# Altium PCB lvSdbPcb.PcbDoc (part 1 of 2)
Units mm, origin at the board's own origin, x right, y up, seen from the top; angles counter-clockwise.
Board outline 45 x 70 mm, 2 copper layers (Top Layer, Bottom Layer); 60 components, 41 nets, 179 pads, 30 vias.
Unrouted connection lines stored in the file: 1.
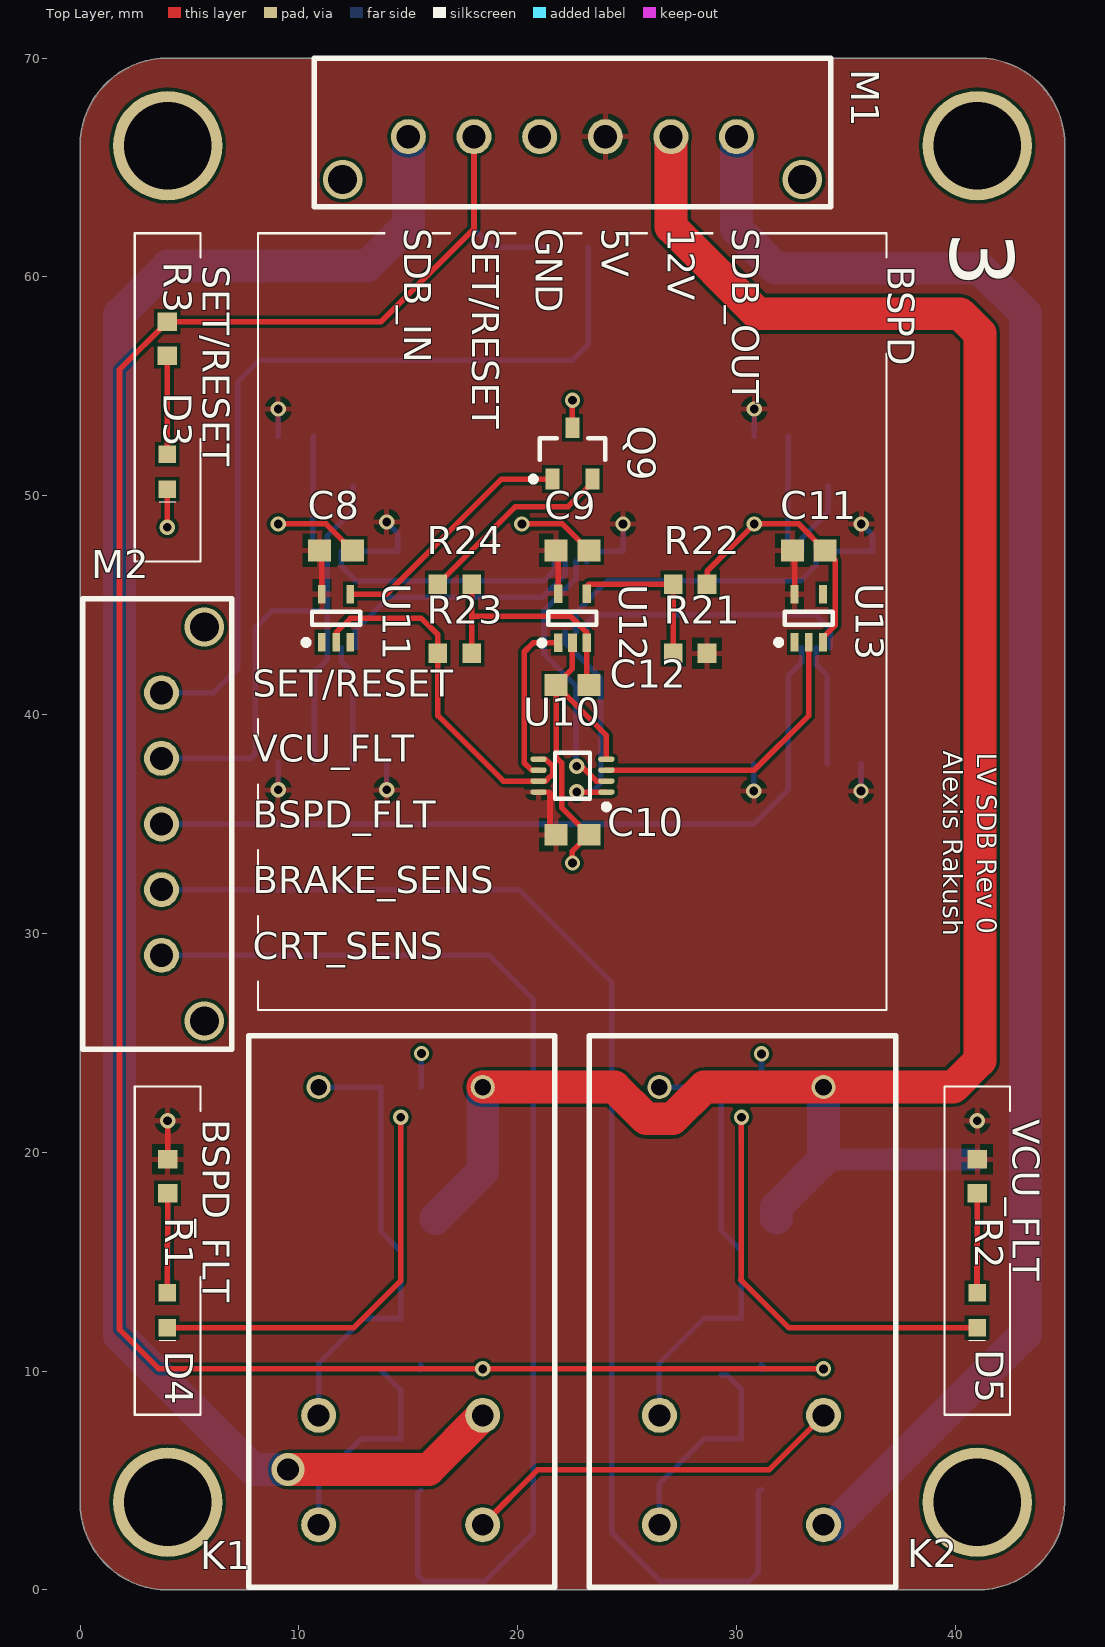
[diagram p0: Top Layer view]
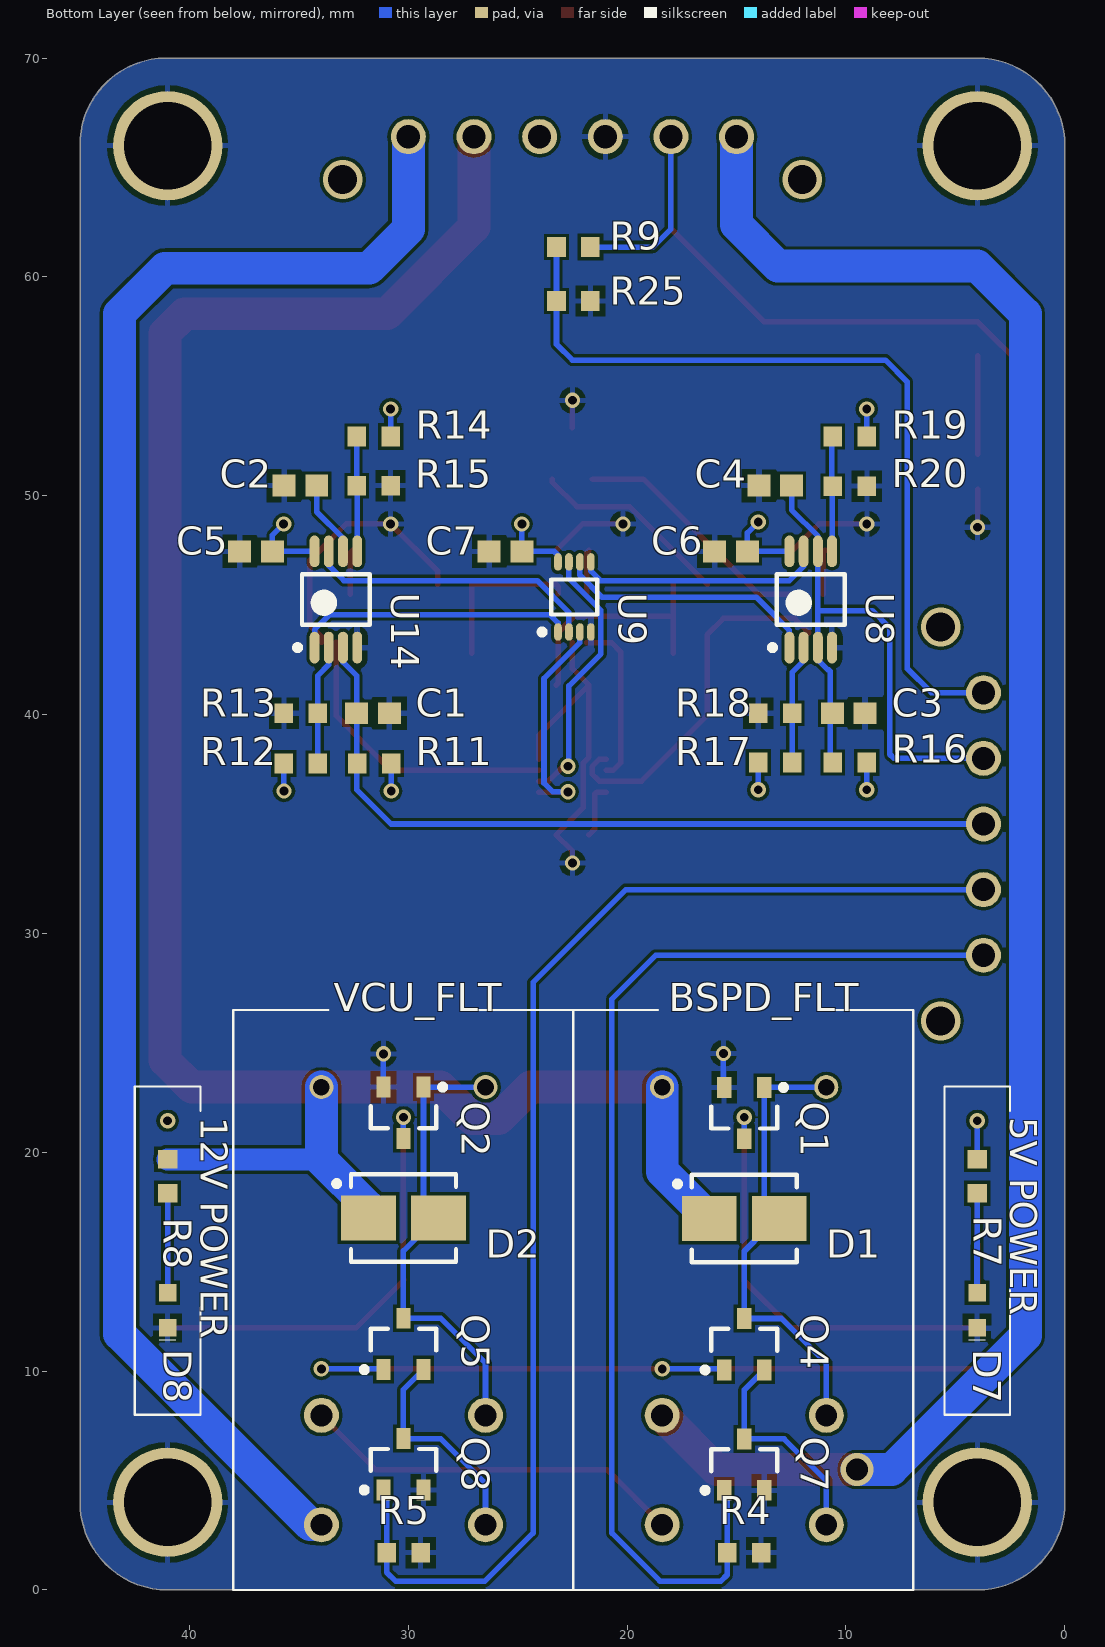
[diagram p1: Bottom Layer view, seen from below]
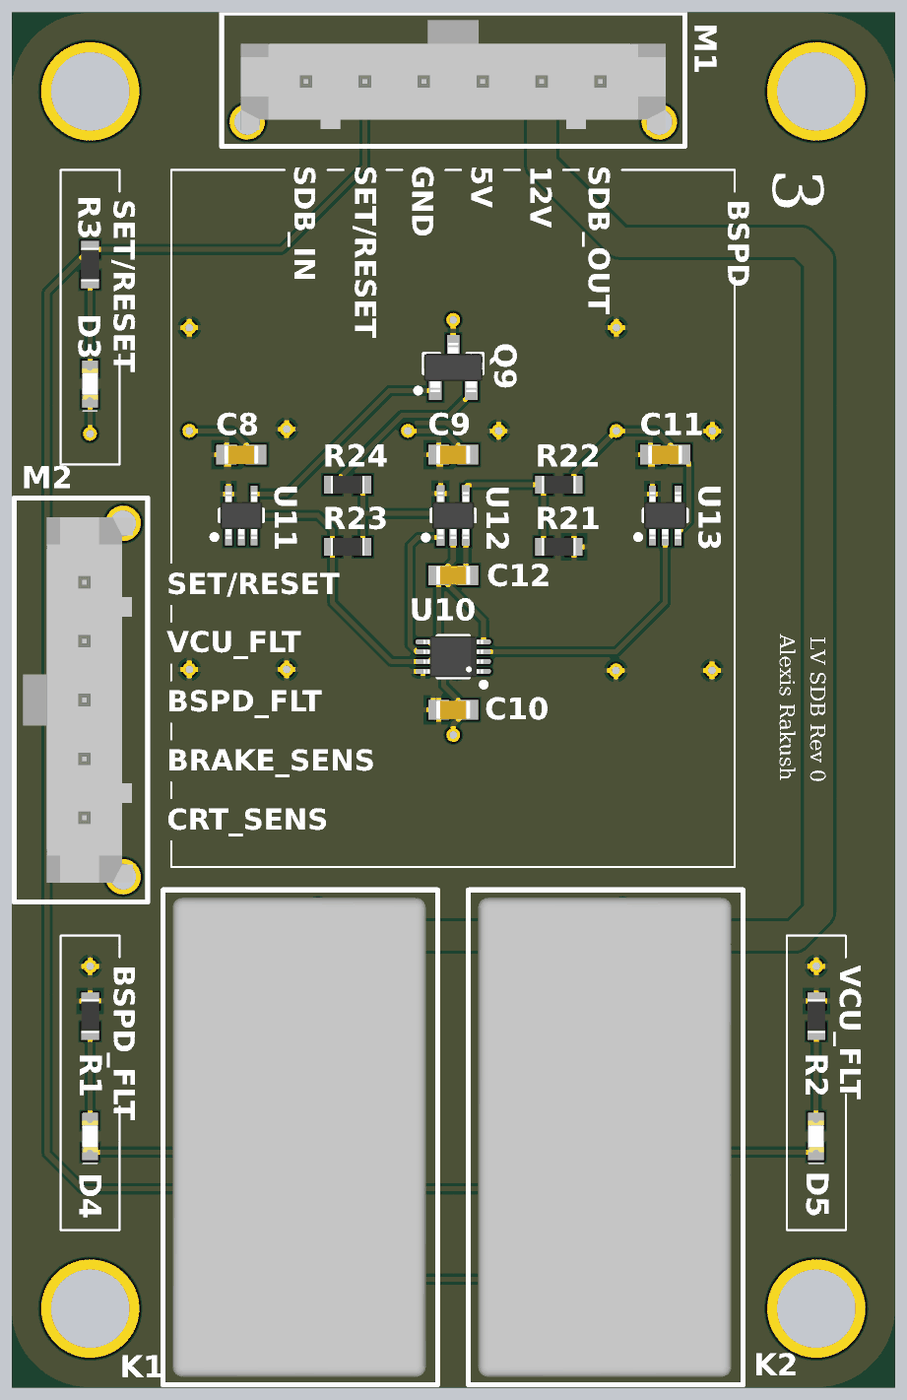
[diagram p2: 3D render of the assembled board from above, using the file's embedded part models]
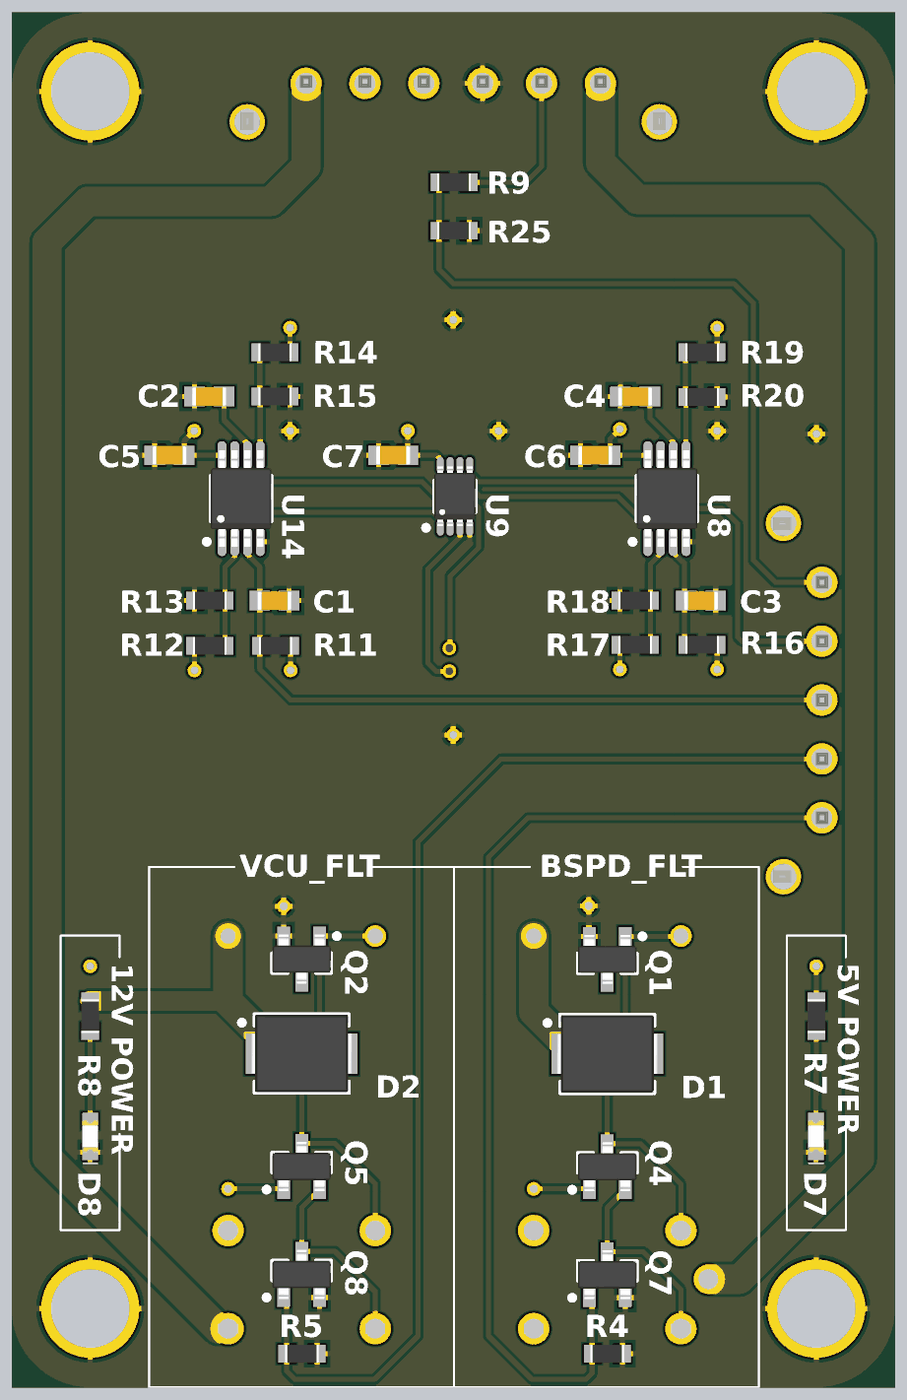
[diagram p3: 3D render of the assembled board from below, using the file's embedded part models]

## Layer stack, top to bottom
Top Solder: solder mask 0.0102, Solder Resist, Dk 3.5
Top Layer: signal copper 0.0356
Dielectric 1: dielectric 0.32, FR-4, Dk 4.8
Bottom Layer: signal copper 0.0356
Bottom Solder: solder mask 0.0102, Solder Resist, Dk 3.5

## Board outline
41,0 ccw(c41,4) 45,4 45,66 ccw(c41.05,66.05) 41.1,70 4,70 ccw(c4,66) 0,66 0,4 ccw(c4,4) 4,0

## Design rules (kind name [scope] priority, off if disabled: settings)
Clearance [All] p1: gap=0.15 ignorepadtopadclearanceinfootprint=TRUE
PolygonConnect [All] p1: connectstyle=Relief reliefconductorwidth=0.254 reliefentries=4 polygonreliefangle="90 Angle" airgapwidth=0.254
RoutingVias [All] p1: holewidth=0.711 width=1.27 viastyle="Through Hole" minholewidth=0.711 minwidth=1.27 maxholewidth=0.711 maxwidth=1.27
SolderMaskExpansion [All] p1: expansion=0.102
Width [All] p1: maxlimit=5 minlimit=0.254 preferedwidth=0.254 minimp=50.000000 maximp=50.000000 favimp=50.000000
30 further rules are at their usual default settings.

## Classes and differential pairs
component class lvSdbSchematic: D1 D2 D3 D4 D5 D7 D8 K1 K2 M1 M2 Q1 Q2 Q4 Q5 Q7 Q8 R1 R2 R3 R4 R5 R7 R8 R9 R25
component class Designator: C1 C2 C3 C4 C5 C6 C7 C8 C9 C10 C11 C12 Q9 R11 R12 R13 R14 R15 R16 R17 R18 R19 R20 R21 R22 R23 R24 U8 U9 U10 U11 U12 U13 U14

## Components (designator, comment, footprint, x,y, rotation, side; value= is the part's Value field where it differs from the comment)
C1 "100nF" CAP-0603 31.611,40.061 r0 bottom
C2 "100nF" CAP-0603 34.936,50.461 r180 bottom
C3 "100nF" CAP-0603 9.875,40.061 r0 bottom
C4 "100nF" CAP-0603 13.236,50.461 r180 bottom
C5 "100nF" CAP-0603 36.961,47.461 r180 bottom
C6 "100nF" CAP-0603 15.261,47.461 r180 bottom
C7 "100nF" CAP-0603 25.561,47.461 r0 bottom
C8 "100nF" CAP-0603 11.7,47.5 r180 top
C9 "100nF" CAP-0603 22.5,47.5 r0 top
C10 "100nF" CAP-0603 22.5,34.507 r180 top
C11 "100nF" CAP-0603 33.3,47.5 r180 top
C12 "15uF" CAP-0603 22.5,41.35 r0 top
D1 "100V" DO-214AA 14.65,16.977 r180 bottom
D2 "100V" DO-214AA 30.223,16.991 r180 bottom
D3 "Green" LED-0603 4,51.125 r90 top
D4 "Red" LED-0603 4,12.8 r90 top
D5 "Red" LED-0603 41,12.8 r90 top
D7 "Green" LED-0603 4,12.8 r90 bottom
D8 "Green" LED-0603 40.987,12.8 r90 bottom
K1 "5-1419124-6" "RELAY DPST SDC" 8.2,24.927 r270 top
K2 "5-1419124-6" "RELAY DPST SDC" 23.773,24.927 r270 top
M1 "WM10676-ND" "6-PIN MOLEX" 22.5,66.5 r0 top
M2 "WM10672-ND" "5-PIN MOLEX" 3.628,35 r90 top
Q1 "DMN6140L-13DICT-ND" SOT-23-3 14.65,21.788 r270 bottom
Q2 "DMN6140L-13DICT-ND" SOT-23-3 30.223,21.802 r270 bottom
Q4 "DMN6140L-13DICT-ND" SOT-23-3 14.65,11.227 r90 bottom
Q5 "DMN6140L-13DICT-ND" SOT-23-3 30.223,11.241 r90 bottom
Q7 "DMN6140L-13DICT-ND" SOT-23-3 14.65,5.727 r90 bottom
Q8 "DMN6140L-13DICT-ND" SOT-23-3 30.223,5.741 r90 bottom
Q9 "BSS138LT3G" SOT-23-3 22.5,51.936 r90 top
R1 "240R" RES-0603 4,18.9 r90 top
R2 "240R" RES-0603 41,18.9 r90 top
R3 "180R" RES-0603 3.987,57.175 r270 top
R4 "10K" RES-0603 14.65,1.7 r0 bottom
R5 "10K" RES-0603 30.21,1.7 r0 bottom
R7 "180R" RES-0603 4,18.9 r90 bottom
R8 "665R" RES-0603 41,18.9 r90 bottom
R9 "1K" RES-0603 22.454,61.365 r180 bottom
R11 "10K" RES-0603 31.561,37.761 r180 bottom
R12 "1K" RES-0603 34.911,37.761 r0 bottom
R13 "3K" RES-0603 34.911,40.061 r180 bottom
R14 "9.1K" RES-0603 31.586,52.711 r180 bottom
R15 "3K" RES-0603 31.586,50.461 r0 bottom
R16 "10K" RES-0603 9.825,37.811 r180 bottom
R17 "1K" RES-0603 13.236,37.811 r0 bottom
R18 "9.1K" RES-0603 13.236,40.061 r180 bottom
R19 "7.5K" RES-0603 9.825,52.711 r180 bottom
R20 "3K" RES-0603 9.825,50.436 r0 bottom
R21 "1.3K" RES-0603 27.875,42.8 r0 top
R22 "2.2K" RES-0603 27.875,45.963 r180 top
R23 "33K" RES-0603 17.125,42.8 r0 top
R24 "499" RES-0603 17.125,45.963 r0 top
R25 "2K" RES-0603 22.454,58.9 r0 bottom
U8 "TLV3202AIDGK" TLV3202AIDGK 11.611,45.261 r90 bottom
U9 "NL27WZ32USGOSCT-ND" TSSOP50P310X90-8N 22.411,45.375 r90 bottom
U10 "SN74LVC2G08DCUT" SN74LVC2G08DCU 22.5,37.211 r180 top
U11 "SN74AHC1G04DCK" SN74AHC1G04DCK 11.7,44.4 r90 top
U12 "TLV3201AIDCKR" TLV3201AIDCK 22.5,44.4 r90 top
U13 "SN74AHC1G04DCK" SN74AHC1G04DCK 33.3,44.4 r90 top
U14 "TLV3202AIDGK" TLV3202AIDGK 33.311,45.261 r90 bottom

## Footprints (in the part's own frame and the unit in brackets; to place one, negate y for a bottom-side part, rotate by r counter-clockwise, add the part's x,y. Pads: shape width x height; smd on the part's side, far side on the other; paste and mask are expansions set on the pad)
"5-PIN MOLEX" [mm]
  round 1.6 hole 1.06: 1(-6,-0.09) 2(-3,-0.09) 3(0,-0.09) 4(3,-0.09) 5(6,-0.09)
  silkscreen extent -10.29,-3.3 10.29,3.5, body extent -9.32,-2.55 9.32,3.05, height 9.95
"6-PIN MOLEX" [mm]
  round 1.6 hole 1.06: 1(-7.5,-0.09) 2(-4.5,-0.09) 3(-1.5,-0.09) 4(1.5,-0.09) 5(4.5,-0.09) 6(7.5,-0.09)
  silkscreen extent -11.8,-3.3 11.8,3.5, body extent -10.82,-2.47 10.82,3.14, height 9.95
CAP-0603 [mm] "Chip Capacitor, 2-Leads, Body 1.60x0.80mm, IPC Medium Density"
  rect 1.05x1 smd: 1(-0.75,0) 2(0.75,0)
  body extent -0.87,-0.48 0.87,0.48, height 0.9
DO-214AA [mm] "Molded Diode, 2-Leads, Body 4.40x3.62mm, IPC Medium Density"
  rect 2.5x2.05 smd: 1(-1.6,0) 2(1.6,0)
  silkscreen extent -3.17,-2 2.4,2, body extent -2.6,-1.97 2.6,1.97, height 2.41
LED-0603 [mm]
  rect 0.8x0.8 smd: 1(0.775,0.013) 2(-0.825,0.013)
  silkscreen extent -1.4,-0.36 -1.4,0.39, body extent -0.82,-0.39 0.78,0.41, height 0.7
"RELAY DPST SDC" [mm]
  round 1.1 hole 0.762: 1(1.95,2.7) 6(1.95,10.2)
  round 1.6 hole 1: 2(16.95,2.7) 3(21.95,2.7) 4(21.95,10.2) 5(16.95,10.2)
  silkscreen extent -0.4,-0.5 24.8,13.5, body extent 0,0 24.4,12.9, height 24.51
RES-0603 [mm] "Chip Resistor, 2-Leads, Body 1.60x0.80mm, IPC Medium Density"
  rect 0.85x0.9 smd: 1(-0.775,0) 2(0.775,0)
  body extent -0.85,-0.45 0.85,0.45, height 0.55
SN74AHC1G04DCK [mm] "SOT23, 5-Leads, Body 2.00x2.10mm, Pitch 0.65mm, IPC Medium Density"
  rect 0.85x0.35 smd: 1(-1.1,0.65) 2(-1.1,0) 3(-1.1,-0.65) 4(1.1,-0.65) 5(1.1,0.65)
  silkscreen extent -1.22,-1.1 0.3,1.5, body extent -1.2,-1.07 1.2,1.07, height 1.1
SN74LVC2G08DCU [mm] "TSSOP, 8-Leads, Body 2.00x2.30mm, Pitch 0.50mm, IPC Medium Density"
  oval 0.75x0.25 smd: 1(-1.55,0.75) 2(-1.55,0.25) 3(-1.55,-0.25) 4(-1.55,-0.75) 5(1.55,-0.75) 6(1.55,-0.25) 7(1.55,0.25) 8(1.55,0.75)
  silkscreen extent -1.68,-1.05 0.8,1.55, body extent -1.55,-1.05 1.55,1.05, height 0.9
SOT-23-3 [mm] "SOT23, 3-Leads, Body 2.90x2.40mm, Pitch 0.92mm, IPC Medium Density"
  rect 0.95x0.65 smd: 1(-1.175,0.915) 2(1.175,0) 3(-1.175,-0.915)
  silkscreen extent -1.3,-1.5 0.7,1.91, body extent -1.25,-1.5 1.25,1.5, height 1.1
TLV3201AIDCK [mm] "SOT23, 5-Leads, Body 2.00x2.10mm, Pitch 0.65mm, IPC Medium Density"
  rect 0.85x0.4 smd: 1(-1.125,0.65) 2(-1.125,0) 3(-1.125,-0.65) 4(1.125,-0.65) 5(1.125,0.65)
  silkscreen extent -1.25,-1.1 0.3,1.52, body extent -1.2,-1.07 1.2,1.07, height 1.1
TLV3202AIDGK [mm] "TSOP, 8-Leads, Body 3.00x3.00mm, Pitch 0.65mm, IPC Medium Density"
  oval 1.45x0.45 smd: 1(-2.2,0.975) 2(-2.2,0.325) 3(-2.2,-0.325) 4(-2.2,-0.975) 5(2.2,-0.975) 6(2.2,-0.325) 7(2.2,0.325) 8(2.2,0.975)
  silkscreen extent -2.32,-1.55 1.15,1.88, body extent -2.45,-1.55 2.45,1.55, height 1.1
TSSOP50P310X90-8N [mm] "TSSOP, 8-Leads, Body 2.00x2.30mm, Pitch 0.50mm, IPC Medium Density"
  oval 0.8x0.35 smd: 1(-1.6,0.75) 2(-1.6,0.25) 3(-1.6,-0.25) 4(-1.6,-0.75) 5(1.6,-0.75) 6(1.6,-0.25) 7(1.6,0.25) 8(1.6,0.75)
  silkscreen extent -1.72,-1.05 0.8,1.6, body extent -1.55,-1.05 1.55,1.05, height 0.9

## Part data
C1 C2 C3 C4 C5 C6 C7 C8 C9 C10 C11: library part CL10B104KB8NNNL, "CAP CER 0.1UF 50V X7R 0603", Capacitance=10uF, Case/Package=0805, Case Code (Metric)=2012, Dielectric=X5R, Manufacturer=Samsung, Manufacturer Part Number=CL21A106KPFNNNG, Max Operating Temperature=85°C, Min Operating Temperature=-55°C, Package Quantity=3000, Supplier Part Number 1=1276-6456-1-ND, Tolerance=10%, Voltage=10V, Case Code (Imperial)=0805, ComponentLink1Description=http://www1.futureelectronics.com/doc/SAMSUNG/CL21A106KPFNNNG.pdf?src-supplier=Future+Electronics, ComponentLink1URL=http://www1.futureelectronics.com/doc/SAMSUNG/CL21A106KPFNNNG.pdf?src-supplier=Future+Electronics, ComponentLink2Description=https://www.verical.com/server-webapp/html/getDatasheet?partID=640497&src-supplier=Verical, ComponentLink2URL=https://www.verical.com/server-webapp/html/getDatasheet?partID=640497&src-supplier=Verical, Depth=1.25mm, Height=1.25mm, Lead Free="Lead Free", Length=2mm, Mount="Surface Mount", Packaging="Tape and Reel", Pricing 1="1=0.15, 10=0.104, 100=0.0489, 500=0.03428, 1000=0.02837 (USD)", Radiation Hardening=No, Stock 1=0, Supplier 1=Digi-Key, Termination=Wraparound, Thickness=0.053inch, Voltage Rating=10V, Width=0.049inch
C12: library part C1608X5R0J156M080AC, "CAP CER 15UF 6.3V X5R 0603"
D1 D2: library part Diode-100V-3A, "DIODE GEN PURP 100V 3A DO214AA", Average Rectified Current=3A, Forward Voltage=1.15V, Manufacturer=MCC, Manufacturer Part Number=S3BB-TP, Max Surge Current=100A, Package Quantity=1, Peak Reverse Current=10uA, Supplier Part Number 1=S3BB-TPMSDKR-ND, ComponentLink1Description=http://www.mccsemi.com/up_pdf/S3AB-S3MB(SMB).PDF?src-supplier=Digi-Key, ComponentLink1URL=http://www.mccsemi.com/up_pdf/S3AB-S3MB(SMB).PDF?src-supplier=Digi-Key, ComponentLink2Description=https://www.verical.com/server-webapp/html/getDatasheet?partID=686538&src-supplier=Verical, ComponentLink2URL=https://www.verical.com/server-webapp/html/getDatasheet?partID=686538&src-supplier=Verical, ComponentLink3Description=http://www.mccsemi.com/up_pdf/S3AB-S3MB(SMB).PDF?src-supplier=Future+Electronics, ComponentLink3URL=http://www.mccsemi.com/up_pdf/S3AB-S3MB(SMB).PDF?src-supplier=Future+Electronics, Element Configuration=Single, Lead Free="Lead Free", Max Repetitive Reverse Voltage (Vrrm)=100V, Max Reverse Voltage (DC)=100V, Mount="Surface Mount", Number of Pins=2, Packaging="Tape and Reel", Peak Non-Repetitive Surge Current=100A, Pricing 1="1=0.46, 10=0.376, 25=0.344, 100=0.216, 250=0.2136, 500=0.2, 1000=0.136 (USD)", Radiation Hardening=No, Reverse Voltage=100V, Stock 1=9444, Supplier 1=Digi-Key
D3 D7 D8: library part LED-Green, "LED GREEN CLEAR 0603 SMD", Case/Package=0603, Case Code (Metric)=1608, Forward Current=30mA, Forward Voltage=2V, Manufacturer="Wurth Electronics", Manufacturer Part Number=150060VS75000, Max Operating Temperature=85°C, Min Operating Temperature=-40°C, Package Quantity=1, Supplier Part Number 1=732-4980-1-ND, Test Current=20mA, Case Code (Imperial)=0603, Color=Green, ComponentLink1Description=https://katalog.we-online.de/led/datasheet/150060VS75000.pdf?src-supplier=Digi-Key, ComponentLink1URL=https://katalog.we-online.de/led/datasheet/150060VS75000.pdf?src-supplier=Digi-Key, Dominant Wavelength=570nm, Height=0.7mm, Length=1.6mm, Lens Style=Clear,Rectangular, Luminous Intensity=40mcd, Mount="Surface Mount", Number of Pins=2, Packaging="Tape and Reel", Pricing 1="1=0.14, 50=0.133, 100=0.114, 500=0.099 (USD)", REACH SVHC=Unknown, Stock 1=118118, Supplier 1=Digi-Key, Viewing Angle=140°, Wavelength=570nm, Width=0.8mm
D4 D5: library part LED-Red, "LED RED CLEAR 0603 SMD", Case/Package=0603, Case Code (Metric)=1608, Forward Current=30mA, Forward Voltage=2V, Manufacturer="Wurth Electronics", Manufacturer Part Number=150060RS75000, Max Operating Temperature=85°C, Min Operating Temperature=-40°C, Package Quantity=1, Supplier Part Number 1=732-4978-6-ND, Test Current=20mA, Case Code (Imperial)=0603, Color=Red, ComponentLink1Description=https://katalog.we-online.de/led/datasheet/150060RS75000.pdf?src-supplier=Digi-Key, ComponentLink1URL=https://katalog.we-online.de/led/datasheet/150060RS75000.pdf?src-supplier=Digi-Key, ComponentLink2Description=http://www.produktinfo.conrad.com/datenblaetter/750000-774999/759428-da-01-en-CHIPLED_0603_W_KL_ROT_150060RS75000.pdf?src-supplier=Conrad, ComponentLink2URL=http://www.produktinfo.conrad.com/datenblaetter/750000-774999/759428-da-01-en-CHIPLED_0603_W_KL_ROT_150060RS75000.pdf?src-supplier=Conrad, Dominant Wavelength=625nm, Height=0.7mm, Length=1.6mm, Lens Style=Clear,Rectangular, Luminous Intensity=250mcd, Mount="Surface Mount", Packaging="Cut Tape", Pricing 1="1=0.14, 50=0.133, 100=0.114, 500=0.099 (USD)", REACH SVHC=Unknown, Stock 1=18518, Supplier 1=Digi-Key, Viewing Angle=140°, Wavelength=625nm, Width=0.8mm
K1 K2: "General Purpose Relay, Osa Series, Power, Non Latching, Dpst-No, 12 Vdc, 3 A Rohs Compliant: Yes", Coil Current=45mA, Coil Power=600mW, Coil Resistance=270R, Coil Voltage (DC)=12V, Contact Current Rating=3A, Contact Voltage Rating (AC)=240V, Manufacturer="TE Connectivity", Max Operating Temperature=60°C, Min Operating Temperature=-30°C, Package Quantity=1000, Supplier Part Number 1=OSA-SS-212DM3,000-ND, Category=Relays, Coil Type=Non-Latching, ComponentLink1Description=http://www.farnell.com/datasheets/1652820.pdf?src-supplier=Farnell, ComponentLink1URL=http://www.farnell.com/datasheets/1652820.pdf?src-supplier=Farnell, ComponentLink2Description=http://www.farnell.com/cad/1652820.pdf?src-supplier=Element14, ComponentLink2URL=http://www.farnell.com/cad/1652820.pdf?src-supplier=Element14, ComponentLink3Description=http://www.te.com/commerce/DocumentDelivery/DDEController?Action=srchrtrv&DocNm=5-1419124-6&DocType=Customer+Drawing&DocLang=English&src-supplier=Digi-Key, ComponentLink3URL=http://www.te.com/commerce/DocumentDelivery/DDEController?Action=srchrtrv&DocNm=5-1419124-6&DocType=Customer+Drawing&DocLang=English&src-supplier=Digi-Key, Contact Material=Silver, ELV=Compliant, Height=0.976inch, Length=24.4mm, Manufacturer Part Number=5-1419124-6, Mount="Through Hole", Operate Time=20ms, Packaging=Box, Pricing 1="1=2.54, 10=2.385, 25=2.1204, 50=2.0142, 100=1.9083, 250=1.69624, 500=1.59022, 1000=1.48421, 5000=1.4312 (USD)", REACH SVHC=Unknown, Relay Type="General Purpose", Release Time=10ms, Stock 1=2593, Supplier 1=Digi-Key, Termination=PCB, Throw Configuration=DPST, Weight=13g, Width=12.9mm
M1: library part "6 PIN HDR", "CONN HEADER VERT 6POS 3MM", Supplier 1=Digi-Key, Supplier Part Number 1=WM10676-ND
M2: library part "5 PIN HDR", "CONN HEADER VERT 5POS 3MM", Supplier 1=Digi-Key, Supplier Part Number 1=WM10672-ND
Q1 Q2 Q4 Q5 Q7 Q8: library part N-FET-60V-1.6A, "MOSFET N-CH 60V 1.6A SOT23", Case/Package=TO-236-3, Continuous Drain Current (ID)=1.6A, Drain to Source Voltage (Vdss)=60V, Input Capacitance=315pF, Manufacturer=Diodes, Manufacturer Part Number=DMN6140L-13, Max Operating Temperature=150°C, Max Power Dissipation=700mW, Min Operating Temperature=-55°C, Package Quantity=10000, Supplier Part Number 1=DMN6140L-13DIDKR-ND, ComponentLink1Description=https://www.diodes.com/assets/Datasheets/DMN6140L.pdf?src-supplier=Digi-Key, ComponentLink1URL=https://www.diodes.com/assets/Datasheets/DMN6140L.pdf?src-supplier=Digi-Key, Mount="Surface Mount", Packaging="Cut Tape", Pricing 1="1=0.34, 10=0.256, 25=0.224, 100=0.1217, 250=0.12104, 500=0.09926, 1000=0.07365, 2500=0.06468, 5000=0.05924 (USD)", Rds On Max=140mR, Stock 1=274948, Supplier 1=Digi-Key
Q9: "MOSFET N-CH 50V 200MA SOT-23", Case/Package=SOT-23-3, Continuous Drain Current (ID)=200mA, Drain to Source Breakdown Voltage=50V, Drain to Source Resistance=3.5R, Gate to Source Voltage (Vgs)=20V, Input Capacitance=50pF, Manufacturer="ON Semiconductor", Max Operating Temperature=150°C, Max Power Dissipation=225mW, Min Operating Temperature=-55°C, Package Quantity=1, Supplier Part Number 1=BSS138LT3GOSCT-ND, Threshold Voltage=500mV, ComponentLink1Description=DigiKey, ComponentLink1URL=https://www.digikey.ca/product-detail/en/BSS138LT3G/BSS138LT3GOSCT-ND/2120566/?itemSeq=274498102, Current Rating=200mA, Drain to Source Voltage (Vdss)=50V, Element Configuration=Single, Halogen Free="Halogen Free", Height=0.94mm, Lead Free="Lead Free", Length=2.9mm, Manufacturer Part Number=BSS138LT3G, Nominal Vgs=500mV, Number of Elements=1, Number of Pins=3, On-State Resistance=3.5R, Packaging="Tape and Reel", Power Dissipation=225mW, Pricing 1="1=0.45, 10=0.408, 100=0.2284, 500=0.12234, 1000=0.0832 (USD)", Radiation Hardening=No, Rds On Max=3.5R, REACH SVHC="No SVHC", Stock 1=195647, Supplier 1=Digi-Key, Turn-Off Delay Time=20ns, Turn-On Delay Time=20ns, Voltage Rating (DC)=50V, Width=1.3mm
R1 R2: library part 0603-240R, "RES 240 OHM 1% 1/10W 0603", Case/Package=0603, Case Code (Metric)=1608, Manufacturer="Stackpole Electronics", Manufacturer Part Number=RMCF0603FT240R, Max Operating Temperature=155°C, Max Power Dissipation=100mW, Min Operating Temperature=-55°C, Package Quantity=5000, Supplier Part Number 1=738-RMCF0603FT240RDKR-ND, Temperature Coefficient=100ppm/°C, Tolerance=1%, Case Code (Imperial)=0603, ComponentLink1Description=https://www.seielect.com/catalog/SEI-RMCF_RMCP.pdf?src-supplier=Avnet, ComponentLink1URL=https://www.seielect.com/catalog/SEI-RMCF_RMCP.pdf?src-supplier=Avnet, ComponentLink2Description=http://components.arrow.com/part/dataview/40960290S7280662N1174?src-supplier=Arrow, ComponentLink2URL=http://components.arrow.com/part/dataview/40960290S7280662N1174?src-supplier=Arrow, ComponentLink3Description=https://www.seielect.com/catalog/SEI-Packaging.pdf?src-supplier=Digi-Key, ComponentLink3URL=https://www.seielect.com/catalog/SEI-Packaging.pdf?src-supplier=Digi-Key, ComponentLink4Description=https://www.seielect.com/Catalog/SEI-RMCF_RMCP.pdf?src-supplier=Digi-Key, ComponentLink4URL=https://www.seielect.com/Catalog/SEI-RMCF_RMCP.pdf?src-supplier=Digi-Key, ComponentLink5Description=http://www.seielect.com/Catalog/SEI-RMC.pdf?src-supplier=Future+Electronics, ComponentLink5URL=http://www.seielect.com/Catalog/SEI-RMC.pdf?src-supplier=Future+Electronics, Composition="Thick Film", Contact Plating=Tin,Matte, Features="Automotive AEC-Q200", Height=0.022inch, Lead Free="Lead Free", Length=0.061inch, Mount="Surface Mount", Number of Terminations=2, Packaging="Tape and Reel", Power Rating=100mW, Pricing 1="1=0.1, 10=0.016, 100=0.0065, 1000=0.00292, 2500=0.00253 (USD)", Radiation Hardening=No, Resistance=240R, Stock 1=23096, Supplier 1=Digi-Key, Width=0.031inch
R3 R7: library part 0603-180R, "RES SMD 180 OHM 1% 1/10W 0603", Case/Package=0603, Case Code (Metric)=1608, Manufacturer="TE Connectivity", Manufacturer Part Number=CRGCQ0603F180R, Max Operating Temperature=155°C, Max Power Dissipation=100mW, Min Operating Temperature=-55°C, Supplier Part Number 1=A129679DKR-ND, Temperature Coefficient=100ppm/°C, Tolerance=1%, Case Code (Imperial)=0603, ComponentLink1Description=https://www.te.com/commerce/DocumentDelivery/DDEController?Action=srchrtrv&DocNm=1773204-3&DocType=DS&DocLang=English&src-supplier=Digi-Key, ComponentLink1URL=https://www.te.com/commerce/DocumentDelivery/DDEController?Action=srchrtrv&DocNm=1773204-3&DocType=DS&DocLang=English&src-supplier=Digi-Key, ComponentLink2Description=https://www.te.com/commerce/DocumentDelivery/DDEController?Action=srchrtrv&amp;DocNm=1773204-3&amp;DocType=DS&amp;DocLang=English&src-supplier=Digi-Key, ComponentLink2URL=https://www.te.com/commerce/DocumentDelivery/DDEController?Action=srchrtrv&amp;DocNm=1773204-3&amp;DocType=DS&amp;DocLang=English&src-supplier=Digi-Key, ComponentLink3Description=http://www.te.com/commerce/DocumentDelivery/DDEController?Action=srchrtrv&DocNm=1773204-3&DocType=DS&DocLang=English&src-supplier=Digi-Key, ComponentLink3URL=http://www.te.com/commerce/DocumentDelivery/DDEController?Action=srchrtrv&DocNm=1773204-3&DocType=DS&DocLang=English&src-supplier=Digi-Key, ComponentLink4Description=http://www.farnell.com/datasheets/2609223.pdf?src-supplier=Farnell, ComponentLink4URL=http://www.farnell.com/datasheets/2609223.pdf?src-supplier=Farnell, Composition="Thick Film", Features="Moisture Resistant,Automotive AEC-Q200", Number of Terminations=2, Packaging="Tape and Reel", Pricing 1="1=0.1, 10=0.03, 100=0.012, 1000=0.00541, 2500=0.00469 (USD)", Resistance=180R, Stock 1=17329, Supplier 1=Digi-Key
R4 R5: library part 0603-10KR, "RES SMD 10K OHM 5% 1/10W 0603", Case/Package=0603, Case Code (Metric)=1608, Manufacturer=Yageo, Manufacturer Part Number=RC0603JR-0710KL, Max Operating Temperature=155°C, Max Power Dissipation=100mW, Min Operating Temperature=-55°C, Resistance=10kR, Supplier Part Number 1=311-10KGRDKR-ND, Temperature Coefficient=100ppm/°C, Tolerance=5%, Voltage Rating=50V, Case Code (Imperial)=0603, ComponentLink1Description=http://www.yageo.com/documents/recent/PYu-RC_Group_51_RoHS_L_10.pdf?src-supplier=Digi-Key, ComponentLink1URL=http://www.yageo.com/documents/recent/PYu-RC_Group_51_RoHS_L_10.pdf?src-supplier=Digi-Key, Composition="Thick Film", Contact Plating=Tin,Matte, Depth=0.8mm, Features="Moisture Resistant", Height - Seated (Max)=0.022inch, Lead Free="Lead Free", Length=0.063inch, Military Standard=Not, Number of Pins=2, Number of Terminations=2, Packaging="Tape and Reel", Power Rating=100mW, Pricing 1="1=0.1, 10=0.019, 100=0.0077, 1000=0.00347, 2500=0.00301 (USD)", Radiation Hardening=No, REACH SVHC=Unknown, Stock 1=3006558, Supplier 1=Digi-Key, Termination=SMD/SMT, Voltage Rating (DC)=50V, Width=0.031inch
R8: library part 0603-665R, "RES SMD 665 OHM 1% 1/10W 0603", Case/Package=0603, Case Code (Metric)=1608, Manufacturer=Yageo, Manufacturer Part Number=RC0603FR-07665RL, Max Operating Temperature=155°C, Max Power Dissipation=100mW, Min Operating Temperature=-55°C, Package Quantity=1, Supplier Part Number 1=311-665HRDKR-ND, Temperature Coefficient=100ppm/°C, Tolerance=1%, Voltage Rating=75V, Voltage Rating (DC)=50V, Case Code (Imperial)=0603, ComponentLink1Description=http://www.yageo.com/documents/recent/PYu-RC_Group_51_RoHS_L_9.pdf?src-supplier=Digi-Key, ComponentLink1URL=http://www.yageo.com/documents/recent/PYu-RC_Group_51_RoHS_L_9.pdf?src-supplier=Digi-Key, ComponentLink2Description=http://www.yageo.com/documents/recent/PYu-RC0603_51_RoHS_L_4.pdf?src-supplier=Avnet, ComponentLink2URL=http://www.yageo.com/documents/recent/PYu-RC0603_51_RoHS_L_4.pdf?src-supplier=Avnet, ComponentLink3Description=http://www.yageo.com/documents/recent/PYu-RC_Group_51_RoHS_L_10.pdf?src-supplier=Digi-Key, ComponentLink3URL=http://www.yageo.com/documents/recent/PYu-RC_Group_51_RoHS_L_10.pdf?src-supplier=Digi-Key, ComponentLink4Description=http://www.yageo.com/documents/recent/PYu-RC0603_51_RoHS_L_4.pdf?src-supplier=Avnet+Europe, ComponentLink4URL=http://www.yageo.com/documents/recent/PYu-RC0603_51_RoHS_L_4.pdf?src-supplier=Avnet+Europe, Composition="Thick Film", Contact Plating=Tin,Matte, Depth=0.8mm, Features="Moisture Resistant", Height=0.022inch, Lead Free="Lead Free", Length=1.6mm, Military Standard=Not, Number of Terminations=2, Packaging="Tape and Reel", Power Rating=100mW, Pricing 1="1=0.1, 10=0.023, 100=0.0094, 1000=0.00421, 2500=0.00366 (USD)", Resistance=665R, Stock 1=143871, Supplier 1=Digi-Key, Termination=SMD/SMT, Weight=7.1E-05oz, Width=0.8mm
R9: library part 0603-1KR, "RES SMD 1K OHM 1% 1/10W 0603", Case/Package=0603, Case Code (Metric)=1608, Manufacturer="Vishay Dale", Manufacturer Part Number=CRCW06031K00FKEA, Max Operating Temperature=155°C, Max Power Dissipation=100mW, Min Operating Temperature=-55°C, Package Quantity=10, Resistance=1kR, Supplier Part Number 1=541-1.00KHCT-ND, Temperature Coefficient=100ppm/°C, Tolerance=1%, Voltage Rating=75V, Case Code (Imperial)=0603, ComponentLink1Description=http://www.vishay.com/docs/20035/dcrcwe3.pdf?src-supplier=Digi-Key, ComponentLink1URL=http://www.vishay.com/docs/20035/dcrcwe3.pdf?src-supplier=Digi-Key, ComponentLink2Description=http://uk.rs-online.com/webdocs/0d98/0900766b80d98afc.pdf?src-supplier=RSComponents, ComponentLink2URL=http://uk.rs-online.com/webdocs/0d98/0900766b80d98afc.pdf?src-supplier=RSComponents, ComponentLink3Description=http://www.vishay.com/docs/20035/dcrcwe3.pdf?src-supplier=Avnet, ComponentLink3URL=http://www.vishay.com/docs/20035/dcrcwe3.pdf?src-supplier=Avnet, ComponentLink4Description=http://www.vishay.com/docs/20035/dcrcwe3.pdf?src-supplier=Avnet+Asia, ComponentLink4URL=http://www.vishay.com/docs/20035/dcrcwe3.pdf?src-supplier=Avnet+Asia, ComponentLink5Description=http://www.farnell.com/datasheets/2310790.pdf?src-supplier=Element14, ComponentLink5URL=http://www.farnell.com/datasheets/2310790.pdf?src-supplier=Element14, ComponentLink6Description=https://www.distrelec.biz/Web/Downloads/a_/en/flD-CRCW-e3_data_en.pdf?mime=application%2Fpdf&src-supplier=Distrelec, ComponentLink6URL=https://www.distrelec.biz/Web/Downloads/a_/en/flD-CRCW-e3_data_en.pdf?mime=application%2Fpdf&src-supplier=Distrelec, ComponentLink7Description=http://www.vishay.com/docs/20035/dcrcwe3.pdf?src-supplier=Future+Electronics, ComponentLink7URL=http://www.vishay.com/docs/20035/dcrcwe3.pdf?src-supplier=Future+Electronics, ComponentLink8Description=http://www.vishay.com/docs/20035/dcrcwe3.pdf?src-supplier=Avnet+Europe, ComponentLink8URL=http://www.vishay.com/docs/20035/dcrcwe3.pdf?src-supplier=Avnet+Europe, Composition="Thick Film", Contact Plating=Tin, Depth=0.85mm, Features="Automotive AEC-Q200", Height=0.45mm, Lead Free="Lead Free", Length=1.55mm, Military Standard=Not, Mount="Surface Mount", Number of Pins=2, Number of Terminations=2, Packaging="Tape and Reel", Power Rating=100mW, Pricing 1="1=0.1, 10=0.034, 100=0.0139, 1000=0.00623, 2500=0.0054 (USD)", Radiation Hardening=No, REACH SVHC=Unknown, Stock 1=671453, Supplier 1=Digi-Key, Termination=SMD/SMT, Voltage Rating (DC)=75V, Weight=7.1E-05oz, Width=0.033inch
R11 R16: library part CRCW060310K0FKEA, "RES SMD 10K OHM 1% 1/10W 0603", Case/Package=0603, Case Code (Metric)=1608, Manufacturer=Vishay, Max Operating Temperature=155°C, Max Power Dissipation=100mW, Min Operating Temperature=-55°C, Package Quantity=10, Resistance=10kR, Supplier Part Number 1=541-10.0KHCT-ND, Temperature Coefficient=100ppm/°C, Tolerance=1%, Voltage Rating=75V, Case Code (Imperial)=0603, Category=Resistors, ComponentLink1Description=http://www.vishay.com/docs/20008/dcrcw.pdf?src-supplier=Avnet+Europe, ComponentLink1URL=http://www.vishay.com/docs/20008/dcrcw.pdf?src-supplier=Avnet+Europe, ComponentLink2Description=https://www.verical.com/server-webapp/html/getDatasheet?partID=86831&src-supplier=Verical, ComponentLink2URL=https://www.verical.com/server-webapp/html/getDatasheet?partID=86831&src-supplier=Verical, ComponentLink3Description=http://www.farnell.com/datasheets/2310790.pdf?src-supplier=Allied+Electronics, ComponentLink3URL=http://www.farnell.com/datasheets/2310790.pdf?src-supplier=Allied+Electronics, ComponentLink4Description=http://www.vishay.com/docs/20035/dcrcwe3.pdf?src-supplier=Digi-Key, ComponentLink4URL=http://www.vishay.com/docs/20035/dcrcwe3.pdf?src-supplier=Digi-Key, ComponentLink5Description=http://www.farnell.com/datasheets/2310790.pdf?src-supplier=Mouser, ComponentLink5URL=http://www.farnell.com/datasheets/2310790.pdf?src-supplier=Mouser, ComponentLink6Description=http://www.farnell.com/datasheets/2310790.pdf?src-supplier=Element14, ComponentLink6URL=http://www.farnell.com/datasheets/2310790.pdf?src-supplier=Element14, ComponentLink7Description=http://www.farnell.com/datasheets/2310790.pdf?src-supplier=Avnet, ComponentLink7URL=http://www.farnell.com/datasheets/2310790.pdf?src-supplier=Avnet, ComponentLink8Description=http://www.vishay.com/docs/20035/dcrcwe3.pdf?src-supplier=Future+Electronics, ComponentLink8URL=http://www.vishay.com/docs/20035/dcrcwe3.pdf?src-supplier=Future+Electronics, ComponentLink9Description=http://uk.rs-online.com/webdocs/0d98/0900766b80d98afc.pdf?src-supplier=RSComponents, ComponentLink9URL=http://uk.rs-online.com/webdocs/0d98/0900766b80d98afc.pdf?src-supplier=RSComponents, ComponentLink10Description=http://www.farnell.com/datasheets/2310790.pdf?src-supplier=Distrelec, ComponentLink10URL=http://www.farnell.com/datasheets/2310790.pdf?src-supplier=Distrelec, Composition="Thick Film", Contact Plating=Tin,Lead, Depth=0.85mm, Features="Automotive AEC-Q200", Height=0.45mm, Lead Free="Lead Free", Length=1.55mm, Manufacturer Part Number=CRCW060310K0FKEA, Military Standard=Not, Number of Pins=2, Number of Terminations=2, Packaging="Tape and Reel", Power Rating=100mW, Pricing 1="1=0.1, 10=0.034, 100=0.0139, 1000=0.00623, 2500=0.0054 (USD)", Radiation Hardening=No, REACH SVHC=Unknown, Stock 1=1434373, Supplier 1=Digi-Key, Termination=SMD/SMT, Voltage Rating (DC)=75V, Weight=7.1E-05oz, Width=0.033inch
R12 R17: library part CRCW06031K00FKEA, "RES SMD 1K OHM 1% 1/10W 0603", Case/Package=0603, Case Code (Metric)=1608, Manufacturer="Vishay Dale", Max Operating Temperature=155°C, Max Power Dissipation=100mW, Min Operating Temperature=-55°C, Package Quantity=10, Resistance=1kR, Supplier Part Number 1=541-1.00KHCT-ND, Temperature Coefficient=100ppm/°C, Tolerance=1%, Voltage Rating=75V, Case Code (Imperial)=0603, Category=Resistors, ComponentLink1Description=http://www.vishay.com/docs/20035/dcrcwe3.pdf?src-supplier=Digi-Key, ComponentLink1URL=http://www.vishay.com/docs/20035/dcrcwe3.pdf?src-supplier=Digi-Key, ComponentLink2Description=http://uk.rs-online.com/webdocs/0d98/0900766b80d98afc.pdf?src-supplier=RSComponents, ComponentLink2URL=http://uk.rs-online.com/webdocs/0d98/0900766b80d98afc.pdf?src-supplier=RSComponents, ComponentLink3Description=http://www.vishay.com/docs/20035/dcrcwe3.pdf?src-supplier=Avnet, ComponentLink3URL=http://www.vishay.com/docs/20035/dcrcwe3.pdf?src-supplier=Avnet, ComponentLink4Description=http://www.vishay.com/docs/20035/dcrcwe3.pdf?src-supplier=Avnet+Asia, ComponentLink4URL=http://www.vishay.com/docs/20035/dcrcwe3.pdf?src-supplier=Avnet+Asia, ComponentLink5Description=http://www.farnell.com/datasheets/2310790.pdf?src-supplier=Element14, ComponentLink5URL=http://www.farnell.com/datasheets/2310790.pdf?src-supplier=Element14, ComponentLink6Description=https://www.distrelec.biz/Web/Downloads/a_/en/flD-CRCW-e3_data_en.pdf?mime=application%2Fpdf&src-supplier=Distrelec, ComponentLink6URL=https://www.distrelec.biz/Web/Downloads/a_/en/flD-CRCW-e3_data_en.pdf?mime=application%2Fpdf&src-supplier=Distrelec, ComponentLink7Description=http://www.vishay.com/docs/20035/dcrcwe3.pdf?src-supplier=Future+Electronics, ComponentLink7URL=http://www.vishay.com/docs/20035/dcrcwe3.pdf?src-supplier=Future+Electronics, ComponentLink8Description=http://www.vishay.com/docs/20035/dcrcwe3.pdf?src-supplier=Avnet+Europe, ComponentLink8URL=http://www.vishay.com/docs/20035/dcrcwe3.pdf?src-supplier=Avnet+Europe, Composition="Thick Film", Contact Plating=Tin, Depth=0.85mm, Features="Automotive AEC-Q200", Height=0.45mm, Lead Free="Lead Free", Length=1.55mm, Manufacturer Part Number=CRCW06031K00FKEA, Military Standard=Not, Mount="Surface Mount", Number of Pins=2, Number of Terminations=2, Packaging="Tape and Reel", Power Rating=100mW, Pricing 1="1=0.1, 10=0.034, 100=0.0139, 1000=0.00623, 2500=0.0054 (USD)", Radiation Hardening=No, REACH SVHC=Unknown, Stock 1=1811474, Supplier 1=Digi-Key, Termination=SMD/SMT, Voltage Rating (DC)=75V, Weight=7.1E-05oz, Width=0.033inch
R13 R15 R20: library part RMCF0603JT3K00, "RES 3K OHM 5% 1/10W 0603"
R14 R18: library part RMCF0603FT9K10, "RES 9.1K OHM 1% 1/10W 0603"
R19: library part RNCP0603FTD7K50, "RES 7.5K OHM 1% 1/8W 0603"
R21: library part MCT06030C1301FP500, "RES SMD 1.3K OHM 1% 1/8W 0603"
R22: library part RC0603FR-072K2L, "RES SMD 2.2K OHM 1% 1/10W 0603"
R23: library part RC0603FR-0733KL, "RES SMD 33K OHM 1% 1/10W 0603"
R24: library part ERA-3AEB4990V, "RES SMD 499 OHM 0.1% 1/10W 0603"
R25: library part 0603-2KR, "RES SMD 2K OHM 1% 1/4W 0603", Case/Package=0603, Case Code (Metric)=1608, Manufacturer="Vishay Dale", Manufacturer Part Number=CRCW06032K00FKEAHP, Max Operating Temperature=155°C, Max Power Dissipation=250mW, Min Operating Temperature=-55°C, Package Quantity=10, Resistance=2kR, Supplier Part Number 1=541-2.00KSDKR-ND, Temperature Coefficient=100ppm/°C, Tolerance=1%, Voltage Rating=75V, Case Code (Imperial)=0603, ComponentLink1Description=http://www.vishay.com/docs/20043/crcwhpe3.pdf?src-supplier=Digi-Key, ComponentLink1URL=http://www.vishay.com/docs/20043/crcwhpe3.pdf?src-supplier=Digi-Key, Composition="Thick Film", Contact Plating=Tin, Depth=0.85mm, Features="Automotive AEC-Q200", Height=0.45mm, Lead Free="Lead Free", Length=1.6mm, Military Standard=Not, Mount="Surface Mount", Number of Terminations=2, Packaging="Tape and Reel", Power Rating=250mW, Pricing 1="1=0.17, 10=0.142, 100=0.0553, 1000=0.02317, 2500=0.02124 (USD)", Radiation Hardening=No, Stock 1=23723, Supplier 1=Digi-Key, Termination=Solder, Weight=7.1E-05oz, Width=0.033inch
U8 U14: "IC COMPAR PWR RRI DL PP 8VSSOP", Case/Package=VSSOP, Input Bias Current=50pA, Input Offset Voltage (Vos)=5mV, Manufacturer="Texas Instruments", Max Operating Temperature=125°C, Max Supply Current=40uA, Max Supply Voltage=5.5V, Min Operating Temperature=-40°C, Min Supply Voltage=2.7V, Nominal Supply Current=50uA, Package Quantity=80, Power Supply Rejection Ratio (PSRR)=85dB, Supplier Part Number 1=296-34992-ND, Common Mode Rejection Ratio=70dB, ComponentLink1Description=digikey.ca, ComponentLink1URL=https://www.digikey.ca/product-detail/en/texas-instruments/TLV3202AIDGK/296-34992-ND/3588984, ComponentLink2Description=https://datasheet.ciiva.com/12288/tlv3202-193866-12288098.pdf, ComponentLink2URL=https://datasheet.ciiva.com/12288/tlv3202-193866-12288098.pdf, ComponentLink3Description=https://datasheet.ciiva.com/23702/1645741-23702136.pdf, ComponentLink3URL=https://datasheet.ciiva.com/23702/1645741-23702136.pdf, ComponentLink4Description=https://datasheet.ciiva.com/8066/1645741-8066013.pdf, ComponentLink4URL=https://datasheet.ciiva.com/8066/1645741-8066013.pdf, Height=0.95mm, Hysteresis=1.2mV, Lead Free="Lead Free", Length=3.1mm, Manufacturer Part Number=TLV3202AIDGK, Max Input Current=50pA, Mount="Surface Mount", Number of Channels=2, Number of Elements=2, Number of Pins=8, Packaging=Rail/Tube, Pricing 1="1=1.77, 80=1.5, 160=1.278, 560=1.05, 1040=0.87 (USD)", Propagation Delay=50ns, Quiescent Current=50uA, Radiation Hardening=No, REACH SVHC="No SVHC", Response Time=0.047us, Stock 1=14534, Supplier 1=Digi-Key, Supplier 2=Digi-Key, Type="General Purpose", Width=3.1mm
U9: "IC GATE OR 2CH 2-INP US8", High Level Output Current=-32mA, Low Level Output Current=32mA, Manufacturer="ON Semiconductor", Manufacturer Part Number=NL27WZ32USG, Max Operating Temperature=85°C, Max Supply Voltage=5.5V, Min Operating Temperature=-40°C, Min Supply Voltage=1.65V, Operating Supply Voltage=3.25V, Output Current=50mA, Package Quantity=1, Quiescent Current=1uA, ComponentLink1Description=https://datasheet.ciiva.com/8277/nl27wz32-d-8277742.pdf?src-supplier=Avnet, ComponentLink1URL=https://datasheet.ciiva.com/8277/nl27wz32-d-8277742.pdf?src-supplier=Avnet, ComponentLink2Description=https://datasheet.ciiva.com/4820/nl27wz32-d-114831-4820790.pdf?src-supplier=Mouser, ComponentLink2URL=https://datasheet.ciiva.com/4820/nl27wz32-d-114831-4820790.pdf?src-supplier=Mouser, ComponentLink3Description=https://datasheet.ciiva.com/15090/getdatasheetpartid-69948-15090488.pdf?src-supplier=Verical, ComponentLink3URL=https://datasheet.ciiva.com/15090/getdatasheetpartid-69948-15090488.pdf?src-supplier=Verical, ComponentLink4Description=https://datasheet.ciiva.com/26864/nl27wz32usg-26864780.pdf?src-supplier=IIIC, ComponentLink4URL=https://datasheet.ciiva.com/26864/nl27wz32usg-26864780.pdf?src-supplier=IIIC, ComponentLink5Description=https://datasheet.ciiva.com/1872/nl27wz32-d-1872823.pdf?src-supplier=Digi-Key, ComponentLink5URL=https://datasheet.ciiva.com/1872/nl27wz32-d-1872823.pdf?src-supplier=Digi-Key, ComponentLink6Description=https://datasheet.ciiva.com/26049/nl27wz32-d-26049116.pdf?src-supplier=Avnet+Europe, ComponentLink6URL=https://datasheet.ciiva.com/26049/nl27wz32-d-26049116.pdf?src-supplier=Avnet+Europe, ComponentLink7Description=https://datasheet.ciiva.com/1872/nl27wz32-d-1872824.pdf?src-supplier=Digi-Key, ComponentLink7URL=https://datasheet.ciiva.com/1872/nl27wz32-d-1872824.pdf?src-supplier=Digi-Key, ComponentLink8Description=https://datasheet.ciiva.com/1872/nl27wz32-d-1872825.pdf?src-supplier=Digi-Key, ComponentLink8URL=https://datasheet.ciiva.com/1872/nl27wz32-d-1872825.pdf?src-supplier=Digi-Key, ComponentLink9Description=https://datasheet.ciiva.com/16471/nl27wz32-d-16471564.pdf?src-supplier=Future+Electronics, ComponentLink9URL=https://datasheet.ciiva.com/16471/nl27wz32-d-16471564.pdf?src-supplier=Future+Electronics, Contact Plating=Tin,Matte, Halogen Free="Halogen Free", Height=0.8mm, Lead Free="Lead Free", Length=2.4mm, Logic Function=OR, Mount="Surface Mount", Number of Circuits=2, Number of Elements=2, Number of Gates=2, Number of Inputs=2, Number of Outputs=1, Number of Pins=8, Packaging="Tape and Reel", Pricing 1="1=0.39000, 10=0.31700, 25=0.29000, 100=0.21570, 250=0.19548, 500=0.16176, 1000=0.12132 (USD)", Propagation Delay=6.2ns, Radiation Hardening=No, REACH SVHC="No SVHC", RoHS=Yes, Schmitt Trigger Input=No, Stock 1=5684, Supplier 1=Digi-Key, Supplier Part Number 1=NL27WZ32USGOSCT-ND, Turn-On Delay Time=5.2ns, Width=2.1mm
U10: "Dual 2-Input Positive-AND Gate", Case/Package=VSSOP, High Level Output Current=-32mA, Low Level Output Current=32mA, Manufacturer="Texas Instruments", Max Operating Temperature=125°C, Max Supply Voltage=5.5V, Min Operating Temperature=-40°C, Min Supply Voltage=1.65V, Package Quantity=1, Quiescent Current=10uA, Supplier Part Number 1=296-26615-1-ND, ComponentLink1Description=Digi-Key, ComponentLink1URL=https://www.digikey.ca/product-detail/en/texas-instruments/SN74LVC2G08DCUT/296-26615-1-ND/2255073, ComponentLink2Description=http://focus.ti.com/lit/ds/symlink/sn74lvc2g08.pdf?src-supplier=Element14, ComponentLink2URL=http://focus.ti.com/lit/ds/symlink/sn74lvc2g08.pdf?src-supplier=Element14, ComponentLink3Description=http://focus.ti.com/lit/ds/symlink/sn74lvc2g08.pdf?src-supplier=Avnet, ComponentLink3URL=http://focus.ti.com/lit/ds/symlink/sn74lvc2g08.pdf?src-supplier=Avnet, ComponentLink4Description=http://www.ti.com/general/docs/lit/getliterature.tsp?genericPartNumber=SN74LVC2G08&&fileType=pdf&src-supplier=Avnet, ComponentLink4URL=http://www.ti.com/general/docs/lit/getliterature.tsp?genericPartNumber=SN74LVC2G08&&fileType=pdf&src-supplier=Avnet, ComponentLink5Description=https://www.verical.com/server-webapp/html/getDatasheet?partID=48823&src-supplier=Verical, ComponentLink5URL=https://www.verical.com/server-webapp/html/getDatasheet?partID=48823&src-supplier=Verical, ComponentLink6Description=http://www.farnell.com/datasheets/1834894.pdf?src-supplier=Element14, ComponentLink6URL=http://www.farnell.com/datasheets/1834894.pdf?src-supplier=Element14, ComponentLink7Description=http://www.ti.com/lit/ds/symlink/sn74lvc2g08.pdf?src-supplier=Digi-Key, ComponentLink7URL=http://www.ti.com/lit/ds/symlink/sn74lvc2g08.pdf?src-supplier=Digi-Key, ComponentLink8Description=http://www.produktinfo.conrad.com/datenblaetter/1000000-1099999/001017175-da-01-en-IC_DU_2IN_PO_SN74LVC2G08DCUT_VSSOP_8_TID.pdf?src-supplier=Conrad, ComponentLink8URL=http://www.produktinfo.conrad.com/datenblaetter/1000000-1099999/001017175-da-01-en-IC_DU_2IN_PO_SN74LVC2G08DCUT_VSSOP_8_TID.pdf?src-supplier=Conrad, Contact Plating=Gold, Lead Free="Lead Free", Logic Function=AND, Manufacturer Part Number=SN74LVC2G08DCUT, Max Output Current=32mA, Mount="Surface Mount", Number of Bits=2, Number of Circuits=2, Number of Elements=2, Number of Gates=2, Number of Input Lines=2, Number of Inputs=2, Number of Output Lines=1, Number of Outputs=1, Number of Pins=8, Output Current=32mA, Packaging="Tape and Reel", Pricing 1="1=0.86, 10=0.769, 100=0.5994 (USD)", Propagation Delay=3.8ns, Radiation Hardening=No, REACH SVHC="No SVHC", Stock 1=2440, Supplier 1=Digi-Key, Termination=SMD/SMT, Turn-On Delay Time=3.8ns, Weight=0.000339oz
U11 U13: "The SN74AHC1G04 contains one inverter gate. The / device performs the Boolean function Y = A bar.", Case/Package=SC, High Level Output Current=-8mA, Low Level Output Current=8mA, Manufacturer="Texas Instruments", Manufacturer Part Number=SN74AHC1G04DCKR, Max Operating Temperature=125°C, Max Supply Voltage=5.5V, Min Operating Temperature=-40°C, Min Supply Voltage=2V, Package Quantity=1, Quiescent Current=1uA, Supplier Part Number 1=296-1090-1-ND, ComponentLink1Description=Digi-Key, ComponentLink1URL=https://www.digikey.com/product-detail/en/texas-instruments/SN74AHC1G04DCKR/296-1090-1-ND/276358, ComponentLink2Description=http://www.farnell.com/datasheets/1759812.pdf?src-supplier=Element14, ComponentLink2URL=http://www.farnell.com/datasheets/1759812.pdf?src-supplier=Element14, ComponentLink3Description=http://www.jameco.com/Jameco/Products/ProdDS/912915.pdf?src-supplier=Jameco, ComponentLink3URL=http://www.jameco.com/Jameco/Products/ProdDS/912915.pdf?src-supplier=Jameco, ComponentLink4Description=http://www.ti.com/lit/ds/symlink/sn74ahc1g04.pdf?src-supplier=Digi-Key, ComponentLink4URL=http://www.ti.com/lit/ds/symlink/sn74ahc1g04.pdf?src-supplier=Digi-Key, ComponentLink5Description=https://www.verical.com/server-webapp/html/getDatasheet?partID=53378&src-supplier=Verical, ComponentLink5URL=https://www.verical.com/server-webapp/html/getDatasheet?partID=53378&src-supplier=Verical, ComponentLink6Description=http://www.farnell.com/datasheets/2024272.pdf?src-supplier=Element14, ComponentLink6URL=http://www.farnell.com/datasheets/2024272.pdf?src-supplier=Element14, ComponentLink7Description=http://www.ti.com/general/docs/lit/getliterature.tsp?genericPartNumber=SN74AHC1G04&amp;&amp;fileType=pdf&src-supplier=Avnet+Asia, ComponentLink7URL=http://www.ti.com/general/docs/lit/getliterature.tsp?genericPartNumber=SN74AHC1G04&amp;&amp;fileType=pdf&src-supplier=Avnet+Asia, Contact Plating=Gold, Height=0.9mm, Lead Free="Lead Free", Length=2mm, Logic Function=Buffer,Inverter,Inverting, Max Output Current=8mA, Mount="Surface Mount", Number of Bits=1, Number of Circuits=1, Number of Elements=1, Number of Gates=1, Number of Inputs=1, Number of Pins=5, Output Current=8mA, Packaging="Tape and Reel", Pricing 1="1=0.43, 10=0.32, 100=0.1996, 500=0.13658, 1000=0.10506 (USD)", Propagation Delay=12ns, Radiation Hardening=No, REACH SVHC="No SVHC", Schmitt Trigger Input=No, Stock 1=120362, Supplier 1=Digi-Key, Termination=SMD/SMT, Turn-On Delay Time=10.6ns, Weight=8.8E-05oz, Width=1.25mm
U12: "Comparator Single R-R I/P 5.5V 5-Pin SC-70 T/R", Case/Package=SOT-23-5, Input Bias Current=5nA, Input Offset Voltage (Vos)=5mV, Manufacturer="Texas Instruments", Max Operating Temperature=125°C, Max Supply Current=40uA, Max Supply Voltage=5.5V, Min Operating Temperature=-40°C, Min Supply Voltage=2.7V, Nominal Supply Current=50uA, Package Quantity=3000, Power Supply Rejection Ratio (PSRR)=85dB, Supplier Part Number 1=296-36751-1-ND, Common Mode Rejection Ratio=85dB, ComponentLink1Description=https://datasheet.ciiva.com/29635/tlv3201-29635045.pdf?src-supplier=Digi-Key, ComponentLink1URL=https://datasheet.ciiva.com/29635/tlv3201-29635045.pdf?src-supplier=Digi-Key, ComponentLink2Description=https://datasheet.ciiva.com/2966/tlv3202-2966812.pdf?src-supplier=Avnet, ComponentLink2URL=https://datasheet.ciiva.com/2966/tlv3202-2966812.pdf?src-supplier=Avnet, Hysteresis=1.2mV, Lead Free="Lead Free", Manufacturer Part Number=TLV3201AIDCKR, Max Input Current=5nA, Mount="Surface Mount", Number of Channels=1, Number of Elements=1, Number of Pins=5, Packaging="Tape and Reel", Pricing 1="1=1.36000, 10=1.21500, 100=0.94760, 500=0.78280, 1000=0.61800 (USD)", Propagation Delay=50ns, Quiescent Current=40uA, Radiation Hardening=No, Response Time=0.047us, RoHS=Yes, Stock 1=34988, Supplier 1=Digi-Key, Type="General Purpose"

## Free pads (board coordinates)
  round 5 hole 4 unplated: 0(4,4) 0(4,66) 0(41,4) 0(41,66)

## Via types
v1: diameter 0.7, hole 0.4, Top Layer to Bottom Layer, 25 vias
v2: diameter 1.8, hole 1.32, Top Layer to Bottom Layer, 4 vias
v3: diameter 1.5, hole 1, Top Layer to Bottom Layer, 1 vias

## Nets (pads, with @x,y where several pads share a name; then routed paths per layer and width w, separated by ;. In a path a pad name is that pad's centre, name@x,y a point inside that pad or via, vN(x,y) a via of type N, cw(c..) or ccw(c..) an arc to the next point about the centre after c; other vN are vias at no path point)
5V: C5.2 C6.2 C7.1 C8.2 C9.1 C10.2 C11.2 M1.4 R1.2 R2.2 R7.2 R11.2 R12.2 R14.2 R16.2 R17.2 R19.2 R21.2 U8.8 U9.8 U10.8 U11.5 U12.5 U13.5 U14.8 | length 29.8
  Top Layer w0.254: R1.2 v1(4,21.44) ; C8.2 11.05,47.4 U11.5 ; U10.8 21.4,36.461 21.473,36.388 21.473,34.784 C10.2 ; C9.1 21.85,47.4 U12.5@21.85,45.55 ; C11.2 32.65,47.4 U13.5
  Bottom Layer w0.254: R7.2 v1(4,21.44) ; v1(9.05,36.561) R16.2 ; R19.2 v1(9.05,53.961) ; U8.8 C6.2 14.511,48.3 v1(14.011,48.8) ; v1(14.011,36.561) R17.2 ; U9.8 23.161,47.289 23.333,47.461 C7.1 v1(24.811,48.711) ; v1(30.786,36.511) R11.2 ; R14.2 v1(30.811,53.961) ; U14.8 C5.2 36.211,48.2 v1(35.7,48.711) ; v1(35.686,36.511) R12.2
  other v1: 41,21.44
12V: D1.1 D2.1 K1.6 K2.6 M1.5 R8.2 | length 98.8
  Top Layer w1.5: K1.6 24.422,22.977 25.872,21.527 27.074,21.527 28.524,22.977 K2.6 39.9,22.977 41.118,24.195 41.118,57.424 40.224,58.318 30.969,58.318 27,62.286 M1.5
  Bottom Layer w1: K1.6@18.35,22.977 K1.6 ; 33.973,19.7 33.998,19.675 R8.2
  Bottom Layer w1.5: D1.1 18.4,19.127 K1.6 ; D2.1 31.823,17.5 33.973,19.65 33.973,19.7 K2.6
BRAKE_REF_HIGH: R17.1 R18.2 U8.2 | length 5.5
  Bottom Layer w0.254: U8.2 11.936,42.454 12.461,41.929 R18.2 R17.1
BSPD_FLT: M2.1 Q7.1 R4.2 | length 52.4
  Bottom Layer w0.254: M2.1 18.7,29 20.7,27 20.7,2.6 18.5,0.4 15.718,0.4 15.425,0.693 R4.2 15.425,4.412 Q7.1
CRT_REF_HIGH: R12.1 R13.2 U14.2 | length 5.5
  Bottom Layer w0.254: U14.2 33.636,42.282 34.136,41.782 R13.2 R12.1
CRT_REF_LOW: R14.1 R15.2 U14.5 | length 5.3
  Bottom Layer w0.254: U14.5 32.336,50.436 R15.2 R14.1
GND: C1.1 C2.1 C3.1 C4.1 C5.1 C6.1 C7.2 C8.1 C9.2 C10.1 C11.1 C12.1 D3.2 D7.2 D8.2 M1.3 pad.0 Q1.3 Q2.3 Q7.3 Q8.3 Q9.2 R4.1 R5.1 R13.1 R15.1 R18.1 R20.1 R22.1 R25.1 U8.4 U9.4 U10.4 U12.2 U13.3 U14.4 | length 41.2
  Top Layer w0.254: v1(3.987,48.56) D3.2 ; v1(9.05,48.711) 11.239,48.711 C8.1 ; v1(20.189,48.711) 22.039,48.711 C9.2 ; v1(22.5,33.217) 22.5,33.757 C10.1 22.006,35.751 22.006,37.795 21.75,38.051 C12.1 ; U12.2 22.5,42.1 C12.1 ; Q9.2 v1(22.5,54.361) ; U10.4 24.05,39.05 C12.1 ; R22.1 28.65,46.55 v1(30.811,48.711) 32.839,48.711 C11.1 34.5,47.05 34.5,44.08 33.95,43.53 U13.3
  Bottom Layer w0.254: Q1.3 15.6,22.998 v1(15.6,24.515) ; Q2.3 v1(31.138,24.494)
NetC1_2: C1.2 C2.2 M2.3 R11.1 U14.3 U14.6 | length 39.5
  Bottom Layer w0.254: M2.3 30.786,35 32.361,36.575 C1.2 32.361,41.779 32.986,42.404 U14.3 ; U14.6 32.986,48.061 34.186,49.261 C2.2
NetC3_2: C3.2 C4.2 M2.4 R16.1 U8.3 U8.6 | length 27.2
  Bottom Layer w0.254: M2.4 7.811,38 8,38.189 8,43.958 8.791,44.749 11.237,44.749 11.286,44.7 ; R16.1@10.711,37.811 10.711,41.979 10.791,42.059 10.844,42.059 11.286,42.501 U8.3 11.286,44.7 ; C4.2 12.486,49.353 11.286,48.153 U8.6 11.286,44.7
NetC12_2: C12.2 R23.2 R24.2 U12.3 | length 11.2
  Top Layer w0.254: R23.2 17.9,44.5 ; R24.2 17.9,44.5 ; C12.2 23.15,41.45 U12.3 23.15,43.75 22.4,44.5 17.9,44.5
NetD1_2: D1.2 K1.1 K1.2 Q1.1 Q4.2 | length 20.8
  Bottom Layer w0.254: K1.2 10.9,10.35 12.952,12.402 Q4.2 14.65,15.477 13.735,16.392 Q1.1 10.914,22.963 K1.1
NetD2_2: D2.2 K2.1 K2.2 Q2.1 Q5.2 | length 20.8
  Bottom Layer w0.254: K2.2 26.473,10.364 28.525,12.416 Q5.2 30.223,15.491 29.308,16.406 Q2.1 K2.1
NetD3_1: D3.1 R3.2 | length 4.5
  Top Layer w0.254: D3.1 R3.2
NetD4_1: D4.1 R1.1 | length 4.6
  Top Layer w0.254: D4.1 R1.1
NetD4_2: D4.2 Q1.2 | length 20.2
  Top Layer w0.254: D4.2 12.5,11.975 14.65,14.125 v1(14.65,21.6) v1@14.65,21.8
  Bottom Layer w0.254: Q1.2 v1(14.65,21.6)
NetD5_1: D5.1 R2.1 | length 4.6
  Top Layer w0.254: D5.1 R2.1
NetD5_2: D5.2 Q2.2 | length 20.1
  Top Layer w0.254: v1(30.223,21.6) 30.223,14.194 30.2,14.171 32.396,11.975 D5.2
  Bottom Layer w0.254: Q2.2 v1(30.223,21.6)
NetD7_1: D7.1 R7.1 | length 4.6
  Bottom Layer w0.254: R7.1 D7.1
NetD8_1: D8.1 R8.1 | length 4.6
  Bottom Layer w0.254: D8.1 R8.1
NetK1_3: K1.3 Q4.3 Q7.2 | length 10.1
  Bottom Layer w0.254: K1.3 10.9,4.977 12.825,6.902 Q7.2 14.65,9.137 Q4.3
NetK1_4: K1.4 K2.5 | length 17.6
  Top Layer w0.254: K1.4 20.923,5.5 31.496,5.5 K2.5
NetK2_3: K2.3 Q5.3 Q8.2 | length 9.9
  Bottom Layer w0.254: K2.3 26.473,4.864 28.525,6.916 Q8.2 30.223,9.151 29.558,9.816 Q5.3@29.308,9.816
NetM2_5: M2.5 R9.1 R25.2 | length 38.2
  Bottom Layer w0.254: M2.5 6.1,41 7.2,42.1 7.2,55.2 8.2,56.2 22.505,56.2 23.229,56.924 R25.2 R9.1
NetQ9_1: Q9.1 U11.4 | length 11.4
  Top Layer w0.254: U11.4 14,45.5 19.261,50.761 Q9.1
NetQ9_3: Q9.3 R24.1 | length 9.1
  Top Layer w0.254: R24.1 19.887,49.5 22.3,49.5 23.415,50.615 Q9.3
NetR19_1: R19.1 R20.2 U8.5 | length 5.3
  Bottom Layer w0.254: U8.5 10.636,50.436 10.661,50.461 R19.1@10.661,52.711
NetR21_1: R21.1 R22.2 U12.4 | length 7.5
  Top Layer w0.254: U12.4 23.15,45.85 23.263,45.963 R22.2 R21.1
NetU8_1: U8.1 U9.6 | length 12
  Bottom Layer w0.254: U8.1 12.586,43.85 14.097,45.361 21.143,45.361 22.161,46.378 U9.6
NetU8_7: U8.7 U9.5 | length 11.3
  Bottom Layer w0.254: U8.7 11.936,46.771 12.586,46.121 21.221,46.121 21.661,46.561 U9.5
NetU9_1: U9.1 U14.1 | length 12.8
  Bottom Layer w0.254: U9.1 23.161,44.193 23.529,44.561 33.611,44.561 34.286,43.886 U14.1
NetU9_2: U9.2 U14.7 | length 13.4